# Altium PCB pumpctrl.PcbDoc
Units mil, origin at the board's own origin, x right, y up, seen from the top; angles counter-clockwise.
Board outline 2025 x 1475 mil, 2 copper layers (Top Layer, Bottom Layer); 41 components, 35 nets, 113 pads, 25 vias.
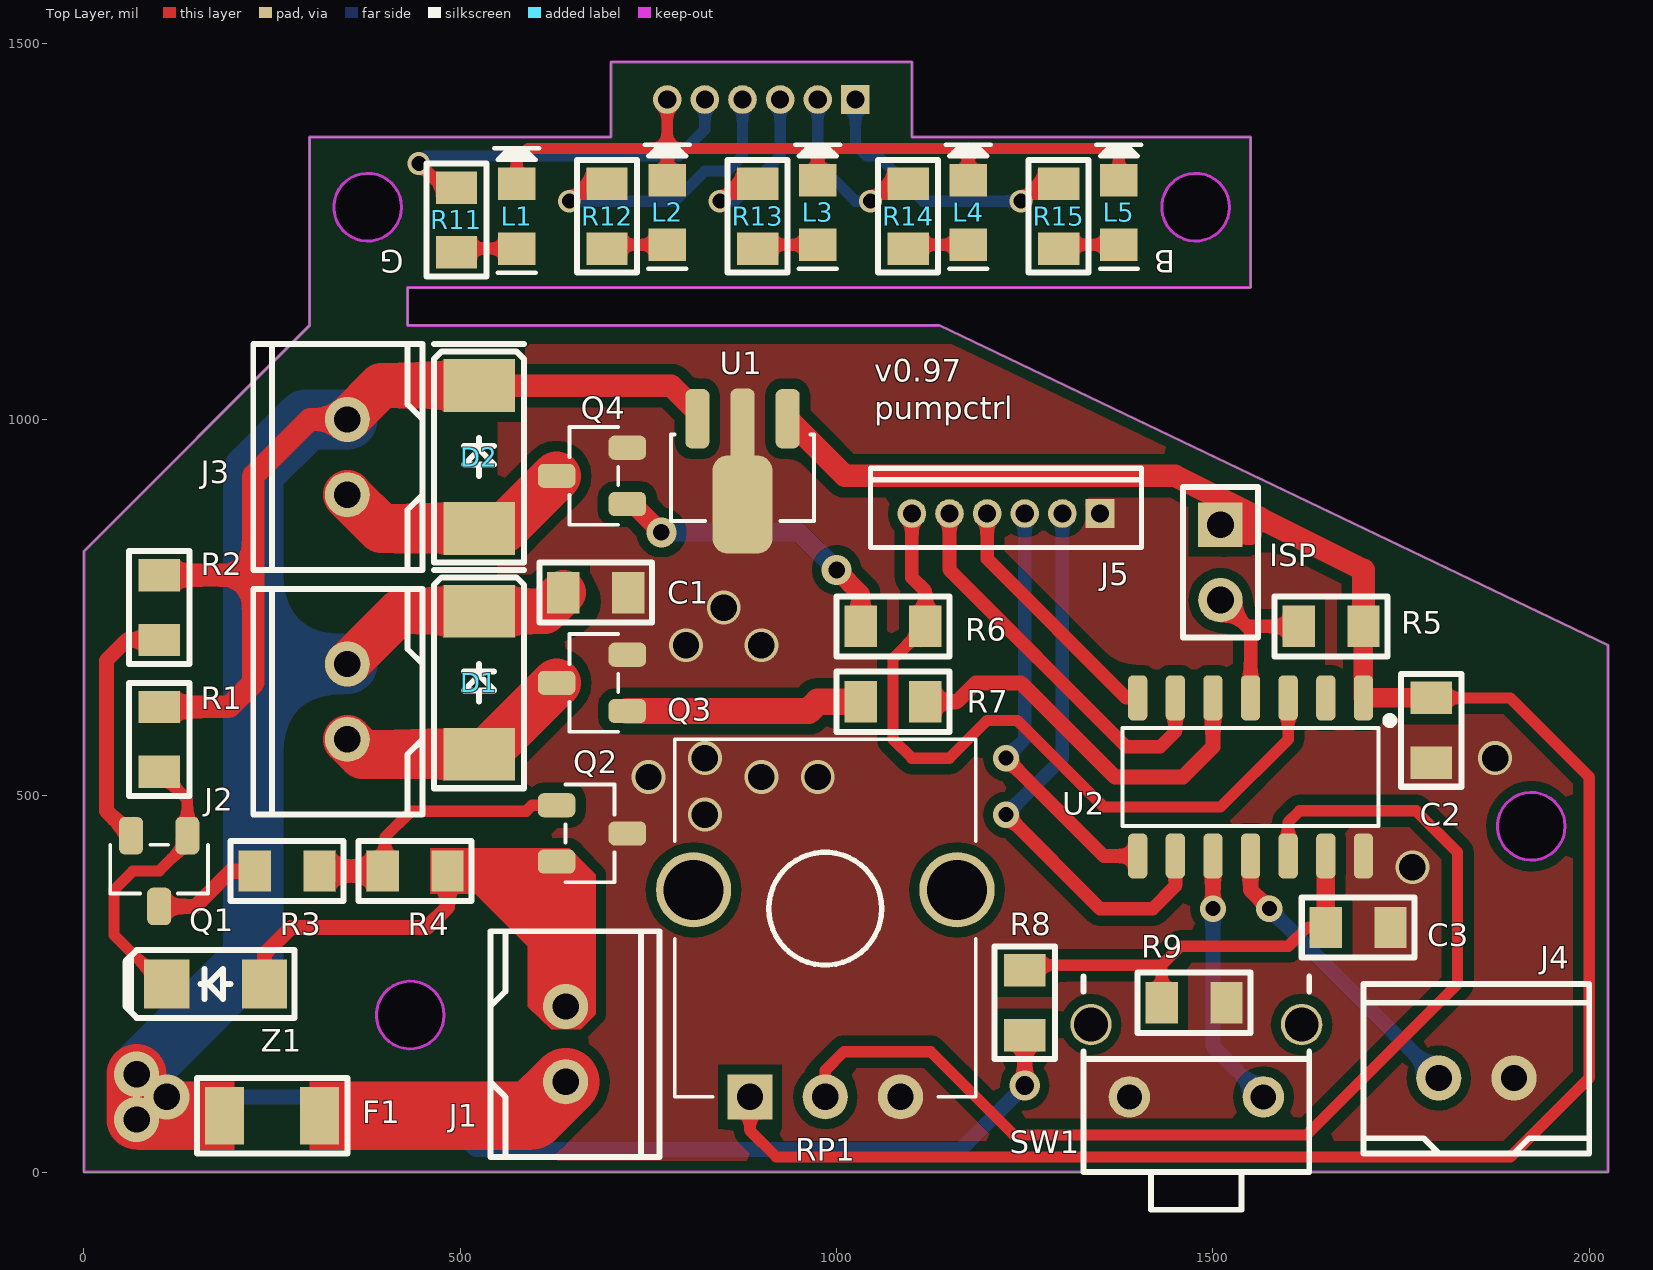
[diagram p0: Top Layer view]
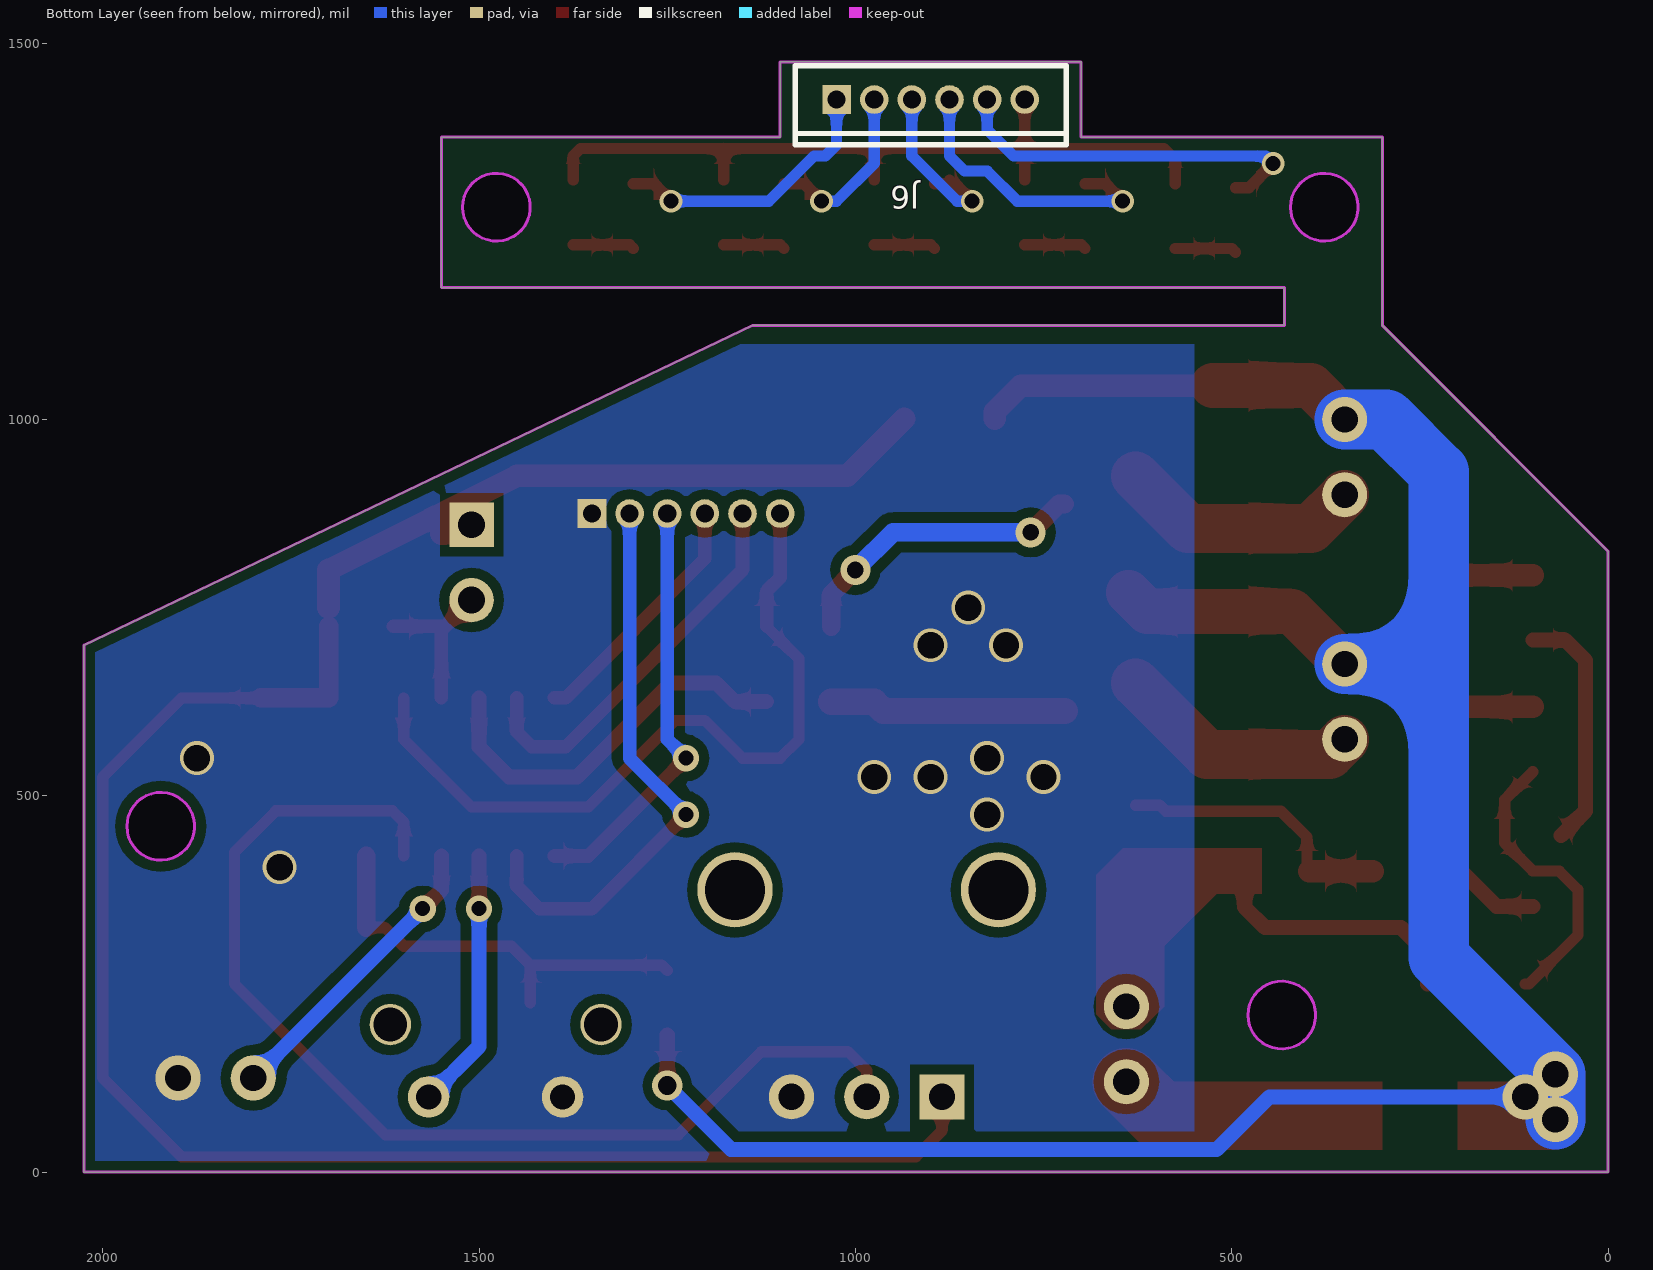
[diagram p1: Bottom Layer view, seen from below]
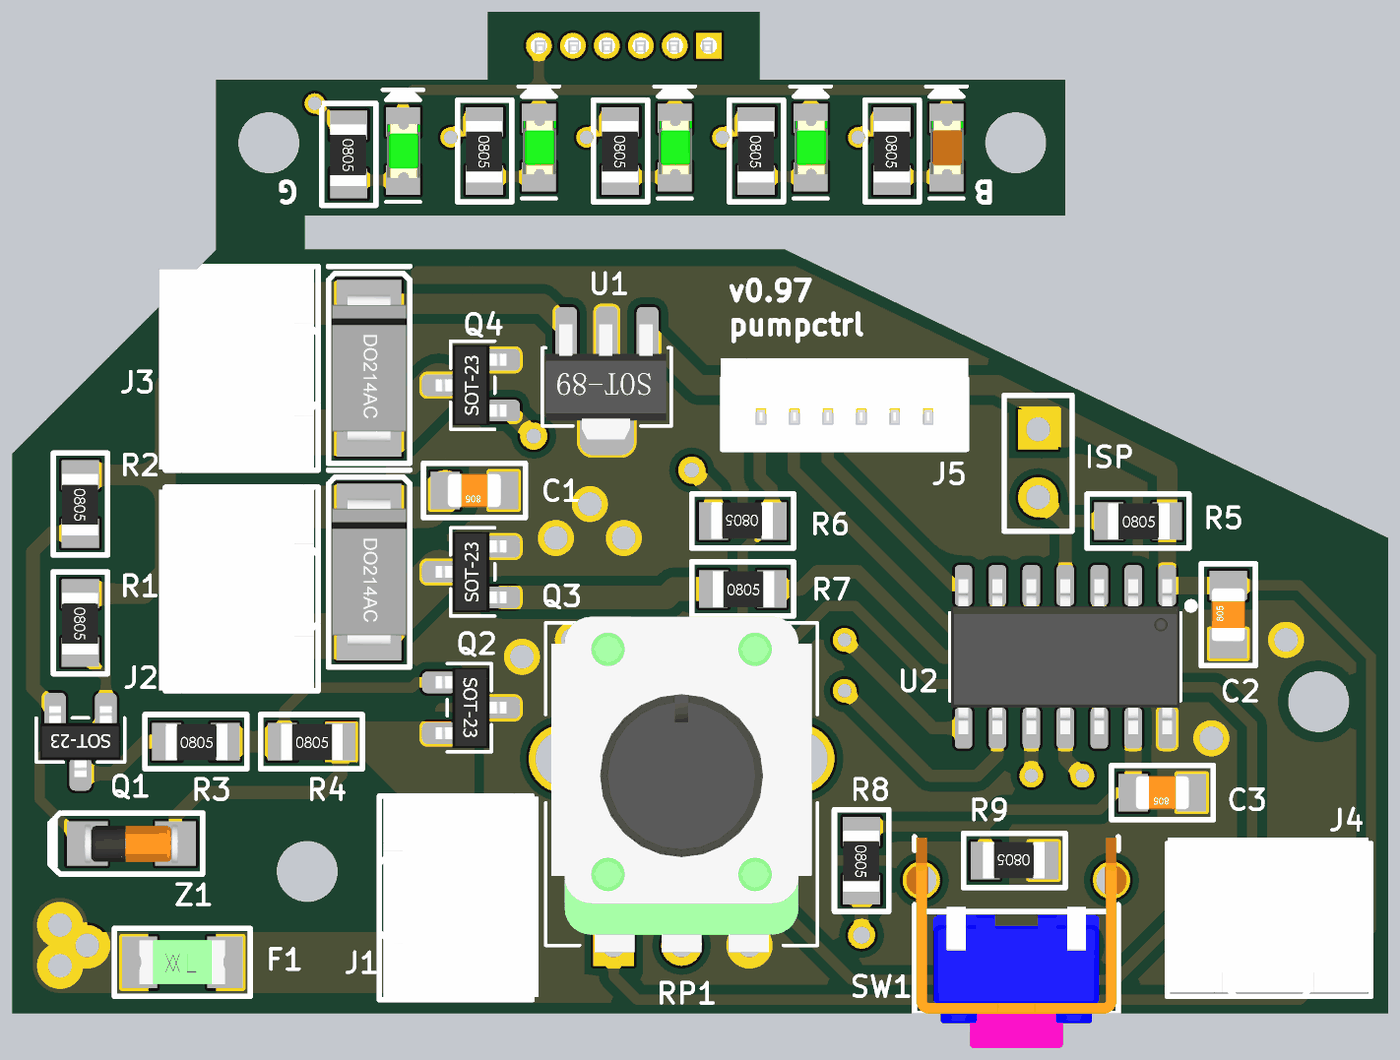
[diagram p2: 3D render of the assembled board from above, using the file's embedded part models]

## Layer stack, top to bottom
Top Solder: solder mask 0.4, Solder Resist, Dk 3.5
Top Layer: signal copper 1.4
Dielectric1: dielectric 12.6, FR-4, Dk 4.8
Bottom Layer: signal copper 1.4
Bottom Solder: solder mask 0.4, Solder Resist, Dk 3.5

## Board outline
0,0 2025,0 2025,700 1136.36,1125 430,1125 430,1175 1550,1175 1550,1375 1100,1375 1100,1475 700,1475 700,1375 300,1375 300,1125 0,825 0,0
cut-out: 478.91,208.91 ccw(c433.91,208.91) 433.91,253.91 ccw(c433.91,208.91) 388.91,208.91 ccw(c433.91,208.91) 433.91,163.91 ccw(c433.91,208.91)
cut-out: 1967.91,458.91 ccw(c1922.91,458.91) 1922.91,503.91 ccw(c1922.91,458.91) 1877.91,458.91 ccw(c1922.91,458.91) 1922.91,413.91 ccw(c1922.91,458.91)
cut-out: 1432,1282 ccw(c1477,1282) 1477,1237 ccw(c1477,1282) 1522,1282 ccw(c1477,1282) 1477,1327 ccw(c1477,1282)
cut-out: 332.39,1282 ccw(c377.39,1282) 377.39,1237 ccw(c377.39,1282) 422.39,1282 ccw(c377.39,1282) 377.39,1327 ccw(c377.39,1282)

## Design rules (kind name [scope] priority, off if disabled: settings)
Clearance Clearance_2 [Not (OnLayer('Keep-Out Layer') OR OnLayer('Multi-Layer')) vs InNet('GND')] p1: gap=14
Clearance Clearance_1 [Not InPolygon vs (OnLayer('Keep-Out Layer') or OnLayer('Multi-Layer'))] p2: gap=5
Clearance [All] p3: gap=13
ComponentClearance [All] p1: gap=10 collisioncheckmode=3 verticalgap=5 showdistances=FALSE
MinimumSolderMaskSliver [All] p1 off: minsoldermaskwidth=10
PlaneConnect [All] p1: planeconnectstyle=Direct reliefexpansion=20 reliefentries=4 reliefconductorwidth=15 reliefairgap=10
PolygonConnect [All] p1: connectstyle=Direct reliefconductorwidth=10 reliefentries=4 polygonreliefangle="90 Angle" airgapwidth=10
RoomDefinition main [InComponentClass('main')] p1: confinementstyle=ConfineOut formatcopy=TRUE lockcomponents=FALSE outline 2247,0 2500,0 2500,200 2247,200
RoutingVias [All] p1: holewidth=28 width=30 viastyle="Through Hole" minholewidth=20 minwidth=25 maxholewidth=100 maxwidth=120
SilkToSilkClearance [All] p1: silktosilkclearance=2
SilkToSolderMaskClearance [IsPad] p1 off: minsilkscreentomaskgap=2 clearancetoexposedcopper=TRUE
SolderMaskExpansion [All] p1: expansion=4
Width [All] p1: maxlimit=120 minlimit=10 preferedwidth=10
25 further rules are at their usual default settings.

## Components (designator, comment, footprint, x,y, rotation, side; value= is the part's Value field where it differs from the comment)
C1 "Cap" CAP0805 680,770 r180 top
C2 "Cap" CAP0805 1790,587 r90 top
C3 "Cap" CAP0805 1693,325 r180 top
D1 "SS34" DO214A 525,650 r90 top
D2 "SS34" DO214A 525,950 r90 top
F1 "4A" FUSE1206 250,75 r0 top
ISP "" HDR1X2 1510,860 r270 top
J1 "Power" JST2 640,170 r270 top
J2 "Motor" JST2 350,625 r90 top
J3 "HV" JST2 350,950 r90 top
J4 "Trigger" JST2 1850,125 r0 top
J5 "Header 6" HDR125_6W 1225,875 r180 top
J6 "Header 6" HDR125_6W 900,1425 r180 bottom
L1 "高亮翠绿" LED2G_SLIM 575,1270 r90 top
L2 "高亮翠绿" LED2G_SLIM 775,1275 r90 top
L3 "高亮翠绿" LED2G_SLIM 975,1275 r90 top
L4 "高亮翠绿" LED2G_SLIM 1175,1275 r90 top
L5 "高亮蓝色" LED2R_SLIM 1375,1275 r90 top
Q1 "2N3906" SOT23_CBE 100,400 r180 top
Q2 "AO3416" SOT23_NMOS 675,450 r270 top
Q3 "AO3416" SOT23_NMOS 675,650 r90 top
Q4 "AO3416" SOT23_NMOS 675,925 r90 top
R1 "Res1" RES0805 100,575 r270 top
R2 "Res1" RES0805 100,750 r270 top
R3 "Res1" RES0805 270,400 r0 top
R4 "Res1" RES0805 440,400 r0 top
R5 "Res1" RES0805 1657,725 r0 top
R6 "Res1" RES0805 1075,725 r180 top
R7 "Res1" RES0805 1075,625 r0 top
R8 "Res1" RES0805 1250,225 r270 top
R9 "Res1" RES0805 1475,225 r180 top
R11 "Res1" RES0805 495,1265 r270 top
R12 "Res1" RES0805 695,1270 r270 top
R13 "Res1" RES0805 895,1270 r270 top
R14 "Res1" RES0805 1095,1270 r270 top
R15 "Res1" RES0805 1295,1270 r270 top
RP1 "RPot" POT_RV09 985,100 r0 top locked
SW1 "" TACT2 1477.95,100 r0 top locked
U1 "78L05" SOT89_VREG 875,1000 r180 top
U2 "TINY24A" SO14 1625,525 r180 top
Z1 "10V" 1N4148SMT 175,250 r180 top

## Footprints (in the part's own frame and the unit in brackets; to place one, negate y for a bottom-side part, rotate by r counter-clockwise, add the part's x,y. Pads: shape width x height; smd on the part's side, far side on the other; paste and mask are expansions set on the pad)
1N4148SMT [mil]
  rect 60x65 smd: 1(-65,0) 2(65,0)
  silkscreen extent -105,-45 120,45, body extent -69,-28 69,29, height 58
CAP0805 [mil]
  rect 43x55 smd: 1(-43,0) 2(43,0)
  silkscreen extent -75,-40 75,40, body extent -39,-25 39,25, height 31
DO214A [mil]
  rect 70x95 smd: 1(-95,0) 2(95,0)
  silkscreen extent -140,-60 150,60, body extent -108,-55 108,55, height 90
FUSE1206 [mil]
  rect 52x76 smd: 1(-63,0) 2(63,0)
  silkscreen extent -100,-50 100,50, body extent -63,-33 63,33, height 22
HDR1X2 [mm] "Connector; Header; 2 Position"
  rect 1.5x1.5 hole 0.9: 1(0,0)
  round 1.5 hole 0.9: 2(2.54,0)
  silkscreen extent -1.27,-1.27 3.81,1.27
HDR125_6W [mil]
  rect 38x38 hole 24: 1(-125,0)
  round 38 hole 24: 2(-75,0) 3(-25,0) 4(25,0) 5(75,0) 6(125,0)
  silkscreen extent -180,-60 180,45, body extent -182,-90 182,48, height 200
JST2 [mil]
  round 60 hole 35: 1(-50,0) 2(50,0)
  silkscreen extent -150,-100 150,125, body extent -149,-94 146,134, height 281
LED2G_SLIM [mil]
  rect 43x50 smd: 1(-43,0) 2(43,0)
  silkscreen extent -75,-30 90,30, body extent -40,-26 40,24, height 43
LED2R_SLIM [mil]
  rect 43x50 smd: 1(-43,0) 2(43,0)
  silkscreen extent -75,-30 90,30, body extent -40,-26 40,24, height 43
POT_RV09 [mil]
  rect 60x60 hole 35: 1(-100,0)
  round 60 hole 35: 2(100,0) 3(0,0)
  round 100 hole 80: ""(-175,275) ""(175,275)
  silkscreen extent -200,0 200,475, body extent -192,-10 192,484, height 794
RES0805 [mil]
  rect 43x55 smd: 1(-43,0) 2(43,0)
  silkscreen extent -75,-40 75,40, body extent -44,-27 46,26, height 30
SO14 [mil]
  rrect50% 25.59x60 smd: 1(-75,-105) 2(-25,-105) 3(25,-105) 4(75,-105) 6(175,-105) 7(225,-105) 8(225,105) 9(175,105) 10(125,105) 11(75,105) 12(25,105) 13(-25,105) 14(-75,105)
  rrect50% 25.59x60 smd mask+4: 5(125,-105)
  silkscreen extent -115,-80 245,65, body extent -93,-114 243,114, height 69
SOT23_CBE [mil]
  rrect50% 32x50 smd: B(-37.4,-47) C(0,47) E(37.4,-47)
  silkscreen extent -65,-35 65,30, body extent -59,-52 59,52, height 43
SOT23_NMOS [mil]
  rrect50% 32x50 smd: D(0,47) G(-37.4,-47) S(37.4,-47)
  silkscreen extent -65,-35 65,30, body extent -59,-52 59,52, height 43
SOT89_VREG [mil]
  rrect50% 32x78.74 smd: 1(-60,-1) 3(60,-1)
  rrect50% 80x130 smd: 2(0,113)
  rrect50% 32x120 smd: 2(0,19)
  silkscreen extent -95,20 95,135, body extent -87,-15 90,155, height 59
TACT2 [mil] "Resistor; 2 Leads"
  round 55.12 hole 33.46: 1(-89,0) 2(89,0)
  round 55 hole 45: ""(-140,96) ""(140,96)
  silkscreen extent -150,-150 150,160, body extent -167,-152 167,159, height 293

## Part data
C1 C2 C3: "贴片电容"
D1 D2: library part Diode, "贴片二极管"
F1: library part "Fuse 2", "贴片熔断型保险丝"
ISP: library part "Header 2", "空"
J1 J2 J3 J4: library part "Header 2", "JST 2P 插座"
J5 J6: "1.25mm 6P 插座"
L1 L2 L3 L4 L5: library part LED, "贴片LED 0805"
Q1: library part PNP, "PNP General Purpose Amplifier"
Q2 Q3 Q4: library part NMOS, "MOSFET N"
R1 R2 R3 R4 R5 R6 R7 R8 R9 R11 R12 R13 R14 R15: "贴片电阻"
RP1: "Potentiometer"
SW1: library part JP2, "轻触开关"
U1: "三端稳压贴片"
U2: library part TINY13A, "集成电路"
Z1: library part "D Zener", "Zener Diode"

## Via types
v1: diameter 45, hole 35, Top Layer to Bottom Layer, 10 vias
v2: diameter 30, hole 20, Top Layer to Bottom Layer, 5 vias
v3: diameter 35, hole 20, Top Layer to Bottom Layer, 4 vias
v4: diameter 60, hole 35, Top Layer to Bottom Layer, 3 vias
v5: diameter 40, hole 22, Top Layer to Bottom Layer, 2 vias
v6: diameter 40, hole 25, Top Layer to Bottom Layer, 1 vias

## Nets (pads, with @x,y where several pads share a name; then routed paths per layer and width w, separated by ;. In a path a pad name is that pad's centre, name@x,y a point inside that pad or via, vN(x,y) a via of type N, cw(c..) or ccw(c..) an arc to the next point about the centre after c; other vN are vias at no path point)
5V: C2.2 ISP.1 R5.2 RP1.1 U1.1 U2.1 | length 2999.7
  Top Layer w15: RP1.1 885,55 920,20 1895,20 2000,125 2000,525 1895,630 C2.2
  Top Layer w26: R5.2 U2.1 C2.2
  Top Layer w30: U1.1 1011,925 1450,925 1700,800 R5.2@1700,750 ; ISP.1@1523.53,865.28 ccw(c1548.4,874.99) 1550,848.34 cw(c1548.4,874.99) ISP.1@1523.53,865.28
15V: C1.2 D1.2 D2.2 F1.1 J2.2 J3.2 R1.1 R2.1 R8.2 U1.3 | length 4062.2
  Top Layer w20: v6(1250,115) R8.2
  Top Layer w30: R1.1 193,618 225,650 225,793 ; R2.1 225,793 ; J3.2 300,1000 225,925 225,793 ; D2.2 780,1045 815,1010 U1.3
  Top Layer w60: J2.2 420,745 D1.2 612,745 C1.2 ; J3.2 395,1045 D2.2
  Top Layer w80: v4(70,70) v4(70,130)
  Bottom Layer w20: v4(110,100) 450,100 520,30 1165,30 v6(1250,115)
  Bottom Layer w80: v4(70,70) v4(70,130) 225,285 225,675 ; J2.2 225,675 ; J3.2 295,1000 225,930 225,675
GND: C1.1 C2.1 C3.1 J4.2 J5.1 Q2.D Q3.S Q4.S R9.1 RP1.2 SW1.1 U1.2 U2.14
  other v1: 1765,405 825,475 750,525 900,525 975,525 825,550 1875,550 800,700 900,700 850,750
L1_SCK: J5.2 U2.9 | length 760.3
  Top Layer w18: v3(1225,475) 1350,350 1420,350 1450,380 U2.9
  Bottom Layer w18: v3(1225,475) 1300,550 J5.2
L2_MISO: J5.3 U2.8 | length 564.2
  Top Layer w18: v3(1225,550) 1355,420 U2.8
  Bottom Layer w18: v3(1225,550) 1250,575 J5.3
L3_MOSI: J5.4 U2.7 | length 336.6
  Top Layer w18: J5.4 1200,815 1385,630 U2.7
NET_L4: J5.5 U2.6 | length 525.6
  Top Layer w18: J5.5 1150,800 1385,565 1430,565 1450,585 U2.6
NET_L5: J5.6 R6.1 U2.3 | length 1021.2
  Top Layer w15: R6.1 1075,682 1075,575 1100,550 1150,550 1200,600 1240,600 1355,485 1510,485 1600,575 U2.3
  Top Layer w18: J5.6 1100,790 1118,772 R6.1
NetD1_1: D1.1 J2.1 Q3.D | length 325.6
  Top Layer w65: J2.1 370,555 D1.1 533,555 Q3.D
NetD2_1: D2.1 J3.1 Q4.D | length 325.6
  Top Layer w65: J3.1 395,855 D2.1 558,855 Q4.D
NetJ6_1: J6.1 R15.1 | length 370.6
  Top Layer w15: v2(1245,1290) 1268,1313 R15.1
  Bottom Layer w15: J6.1 1025,1365 1040,1350 1055,1350 1115,1290 v2(1245,1290)
NetJ6_2: J6.2 R14.1 | length 235.2
  Top Layer w15: v2(1045,1290) 1068,1313 R14.1
  Bottom Layer w15: J6.2 975,1340 1025,1290 v2(1045,1290)
NetJ6_3: J6.3 R13.1 | length 239.4
  Top Layer w15: v2(845,1290) 868,1313 R13.1
  Bottom Layer w15: v2(845,1290) 865,1290 925,1350 J6.3
NetJ6_4: J6.4 R12.1 | length 389.4
  Top Layer w15: v2(645,1290) 668,1313 R12.1
  Bottom Layer w15: v2(645,1290) 785,1290 825,1330 855,1330 875,1350 J6.4
NetJ6_5: J6.5 R11.1 | length 501.9
  Top Layer w15: v2(445,1340) 477,1308 R11.1
  Bottom Layer w15: v2(445,1340) 455,1350 790,1350 825,1385 J6.5
NetJ6_6: J6.6 L1.2 L2.2 L3.2 L4.2 L5.2 | length 1065.4
  Top Layer w15: L1.2 575,1345 590,1360 775,1360 1365,1360 1375,1350 L5.2 ; L2.2 J6.6 ; L3.2 975,1360 ; L4.2 1175,1360
NetL1_1: L1.1 R11.2 | length 82.1
  Top Layer w15: R11.2 500,1227 L1.1
NetL2_1: L2.1 R12.2 | length 82.1
  Top Layer w15: R12.2 700,1232 L2.1
NetL3_1: L3.1 R13.2 | length 82.1
  Top Layer w15: R13.2 900,1232 L3.1
NetL4_1: L4.1 R14.2 | length 82.1
  Top Layer w15: R14.2 1100,1232 L4.1
NetL5_1: L5.1 R15.2 | length 82.1
  Top Layer w15: R15.2 1300,1232 L5.1
NetQ1_B: Q1.B R1.2 Z1.2 | length 390.3
  Top Layer w15: R1.2 137.4,494.6 Q1.B 137.4,437.4 100,400 65,400 40,375 40,315 105,250 Z1.2
NetQ1_C: Q1.C R3.1 | length 146.5
  Top Layer w20: Q1.C 148,353 195,400 R3.1
NetQ1_E: Q1.E R2.2 | length 327.7
  Top Layer w20: Q1.E 30,479.6 30,680 57,707 R2.2
NetQ2_G: Q2.G R3.2 R4.1 | length 375.8
  Top Layer w15: R4.1 400,403 400,445 434.5,479.5 587.5,479.5 595.4,487.4 Q2.G
  Top Layer w30: R3.2 R4.1
NetQ3_G: Q3.G R7.1 | length 315.1
  Top Layer w35: Q3.G 962.6,612.6 975,625 R7.1
NetQ4_G: Q4.G R6.2 | length 402.5
  Top Layer w25: Q4.G 729.7,887.6 v5(767.3,850) ; v5(1000,800) 1032,768 R6.2
  Bottom Layer w25: v5(767.3,850) 950,850 v5(1000,800)
NetSW1_2: SW1.2 U2.10 | length 347.7
  Top Layer w20: v3(1500,350) U2.10
  Bottom Layer w20: v3(1500,350) 1500,166.95 SW1.2
PWM: R7.2 U2.5 | length 525.7
  Top Layer w20: R7.2 1160,625 1185,650 1245,650 1370,525 1460,525 1500,565 U2.5
RST: ISP.2 R5.1 U2.4 | length 215.6
  Top Layer w18: ISP.2 1545,725 ; U2.4 1550,720 1545,725 ; R5.1 1545,725
THR: RP1.3 U2.12 | length 1488.2
  Top Layer w15: RP1.3 985,135 1010,160 1125,160 1235.56,49.44 1624.44,49.44 1825,250 1825,425 1770,480 1615,480 1600,465 U2.12
TRG: J4.1 U2.11 | length 398.6
  Top Layer w20: U2.11 1550,375 v3(1575,350)
  Bottom Layer w20: v3(1575,350) J4.1
V+: F1.2 J1.2 | length 63.6
  Top Layer w90: 595,75 J1.2
V-: J1.1 Q2.S R4.2 Z1.1 | length 356.7
  Top Layer w20: Z1.1 240,290 275,325 456,325 483,352 R4.2
VBAT: C3.2 R8.1 R9.2 U2.13 | length 568.6
  Top Layer w15: R8.1 1257,275 1432,275 ; R9.2 1432,275 ; C3.2 1625,325 1600,300 1457,300 1432,275
  Top Layer w25: C3.2 U2.13
pads on no net: RP1. SW1. U2.2

## Polygon pours and split planes (outlines as drawn)
GND on Top Layer "Bottom Layer-No Net" (solid, remove dead copper, pour order 4): 550,0 550,1100 1167.86,1100 2025,700 2025,0
GND on Bottom Layer "Bottom Layer-No Net" (solid, remove dead copper, pour order 3): 550,0 550,1100 1167.86,1100 2025,700 2025,0

## Keep-outs
Keep-Out Layer:
  circle w4: c433.46,208.66 r45
  circle w4: c1923,459.45 r45
  circle w4: c377,1282 r45
  circle w4: c1477,1282 r45
  lines w4: 0,0 2025,0 2025,700 1136.36,1125 900,1125 430,1125 430,1175 1550,1175 1550,1375 1100,1375 1100,1475 700,1475 700,1375 675,1375 300,1375 300,1125 0,825 0,0

## Other copper
Top Layer:
  region net V-: 460,430 645,430 680,395 680,210 660,190 621.18,190 590,219.44 590,300 520,370 460,370
  region net V+: 300,120 595,120 595,30 300,30
  region net 15V: 70,120 200,120 200,30 70,30

## Silkscreen, mask and mechanical layers (free items; w line width, h text height)
Top Overlay:
  text "G" at 425,1225 h30 r180
  text "B" at 1450,1225 h30 r180
  text "v0.97" at 1050,1050 h30
  text "pumpctrl" at 1050,1000 h30